# Altium PCB button_ban_dao_pcb.PcbDoc
Units mil, origin at the board's own origin, x right, y up, seen from the top; angles counter-clockwise.
Board outline 1692.91 x 1692.91 mil, 2 copper layers (Top Layer, Bottom Layer); 19 components, 12 nets, 42 pads, 0 vias.
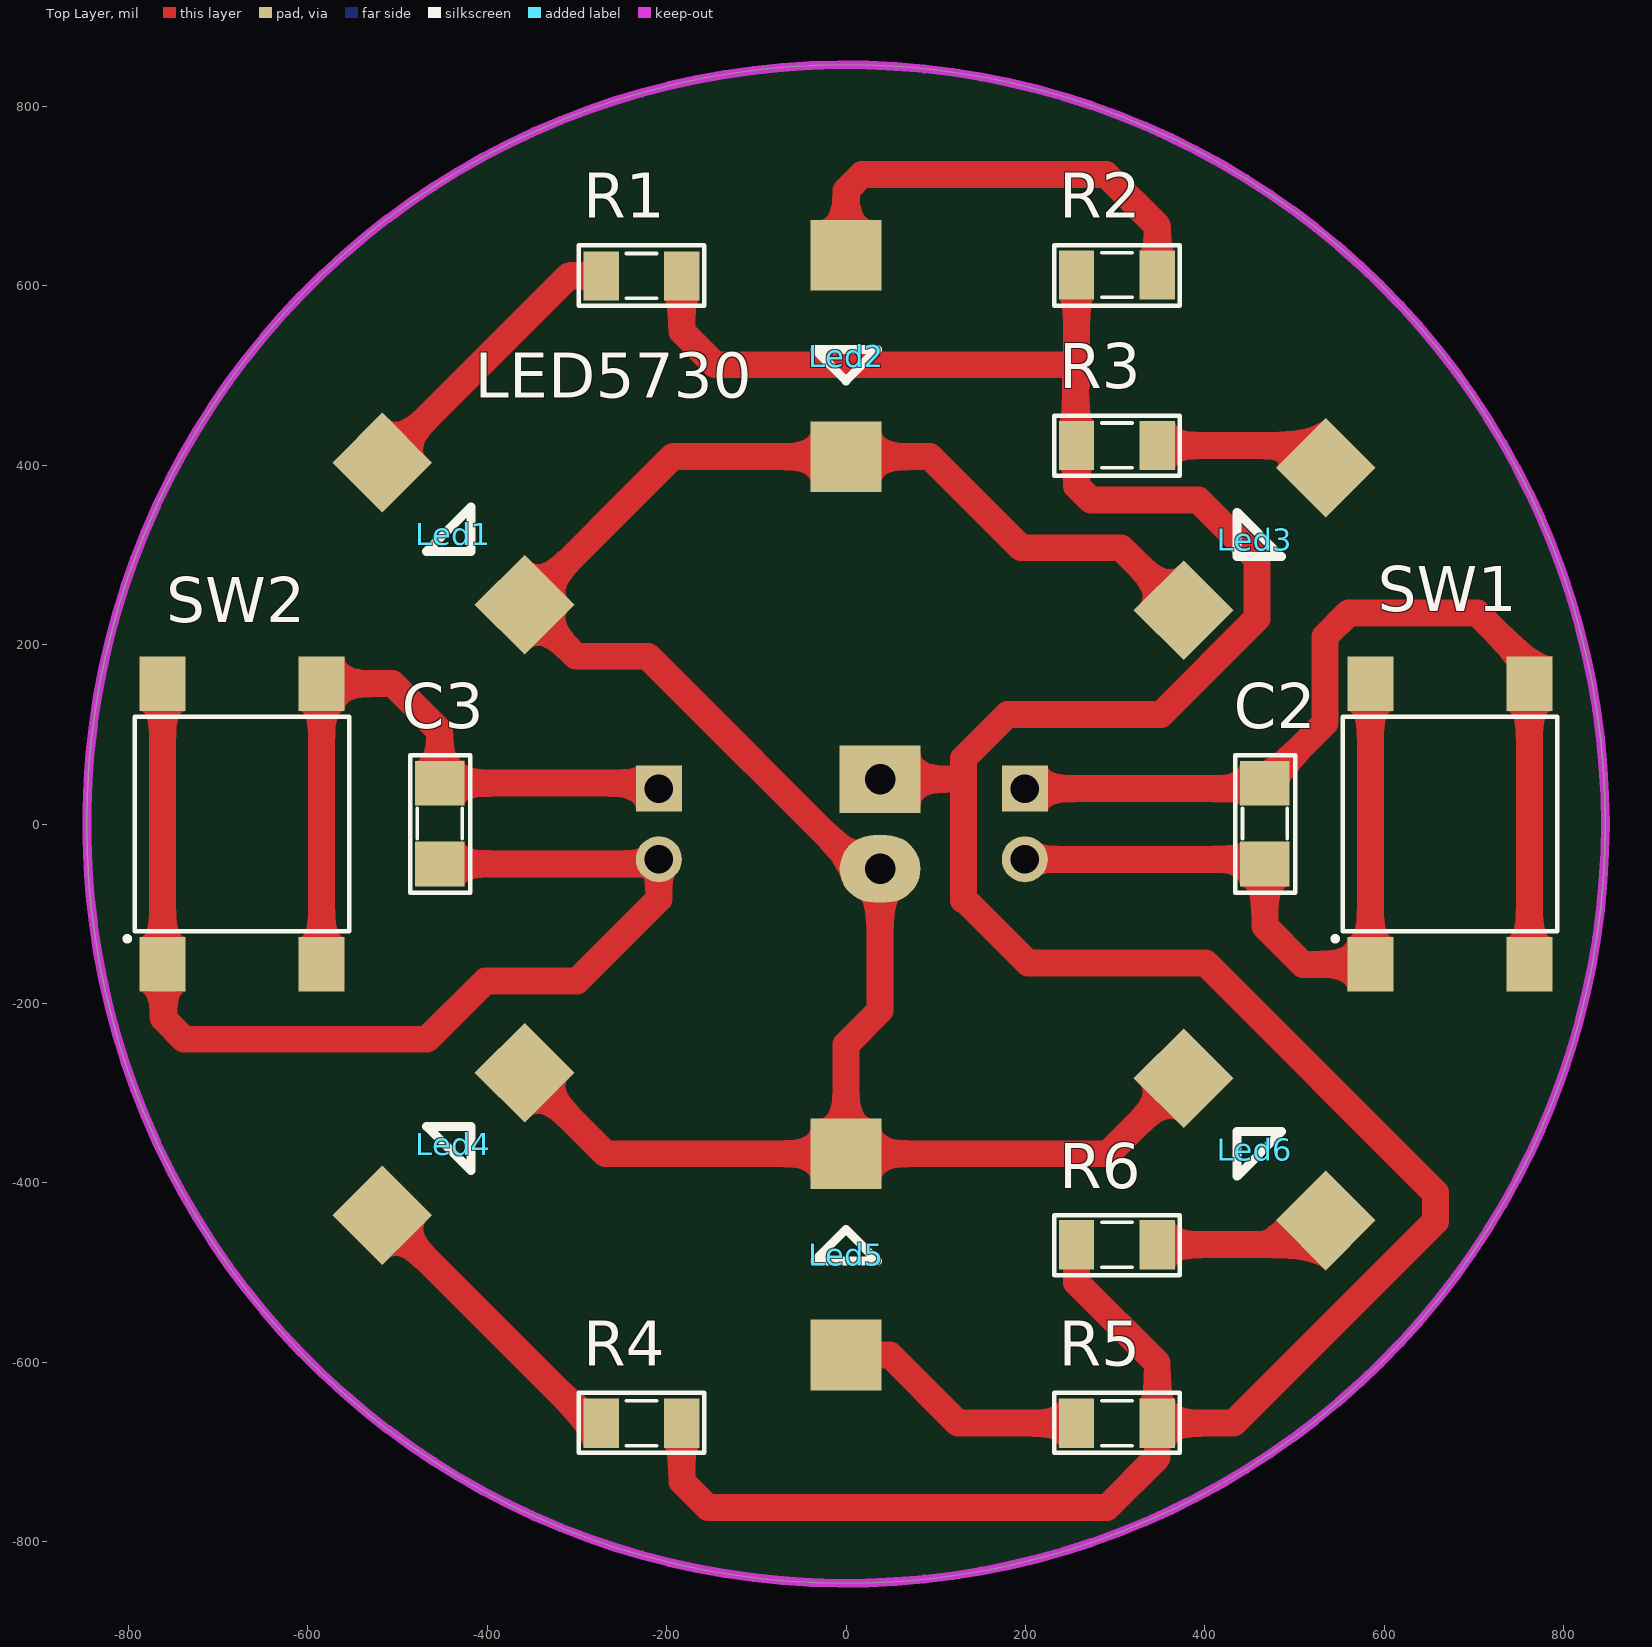
[diagram p0: Top Layer view]
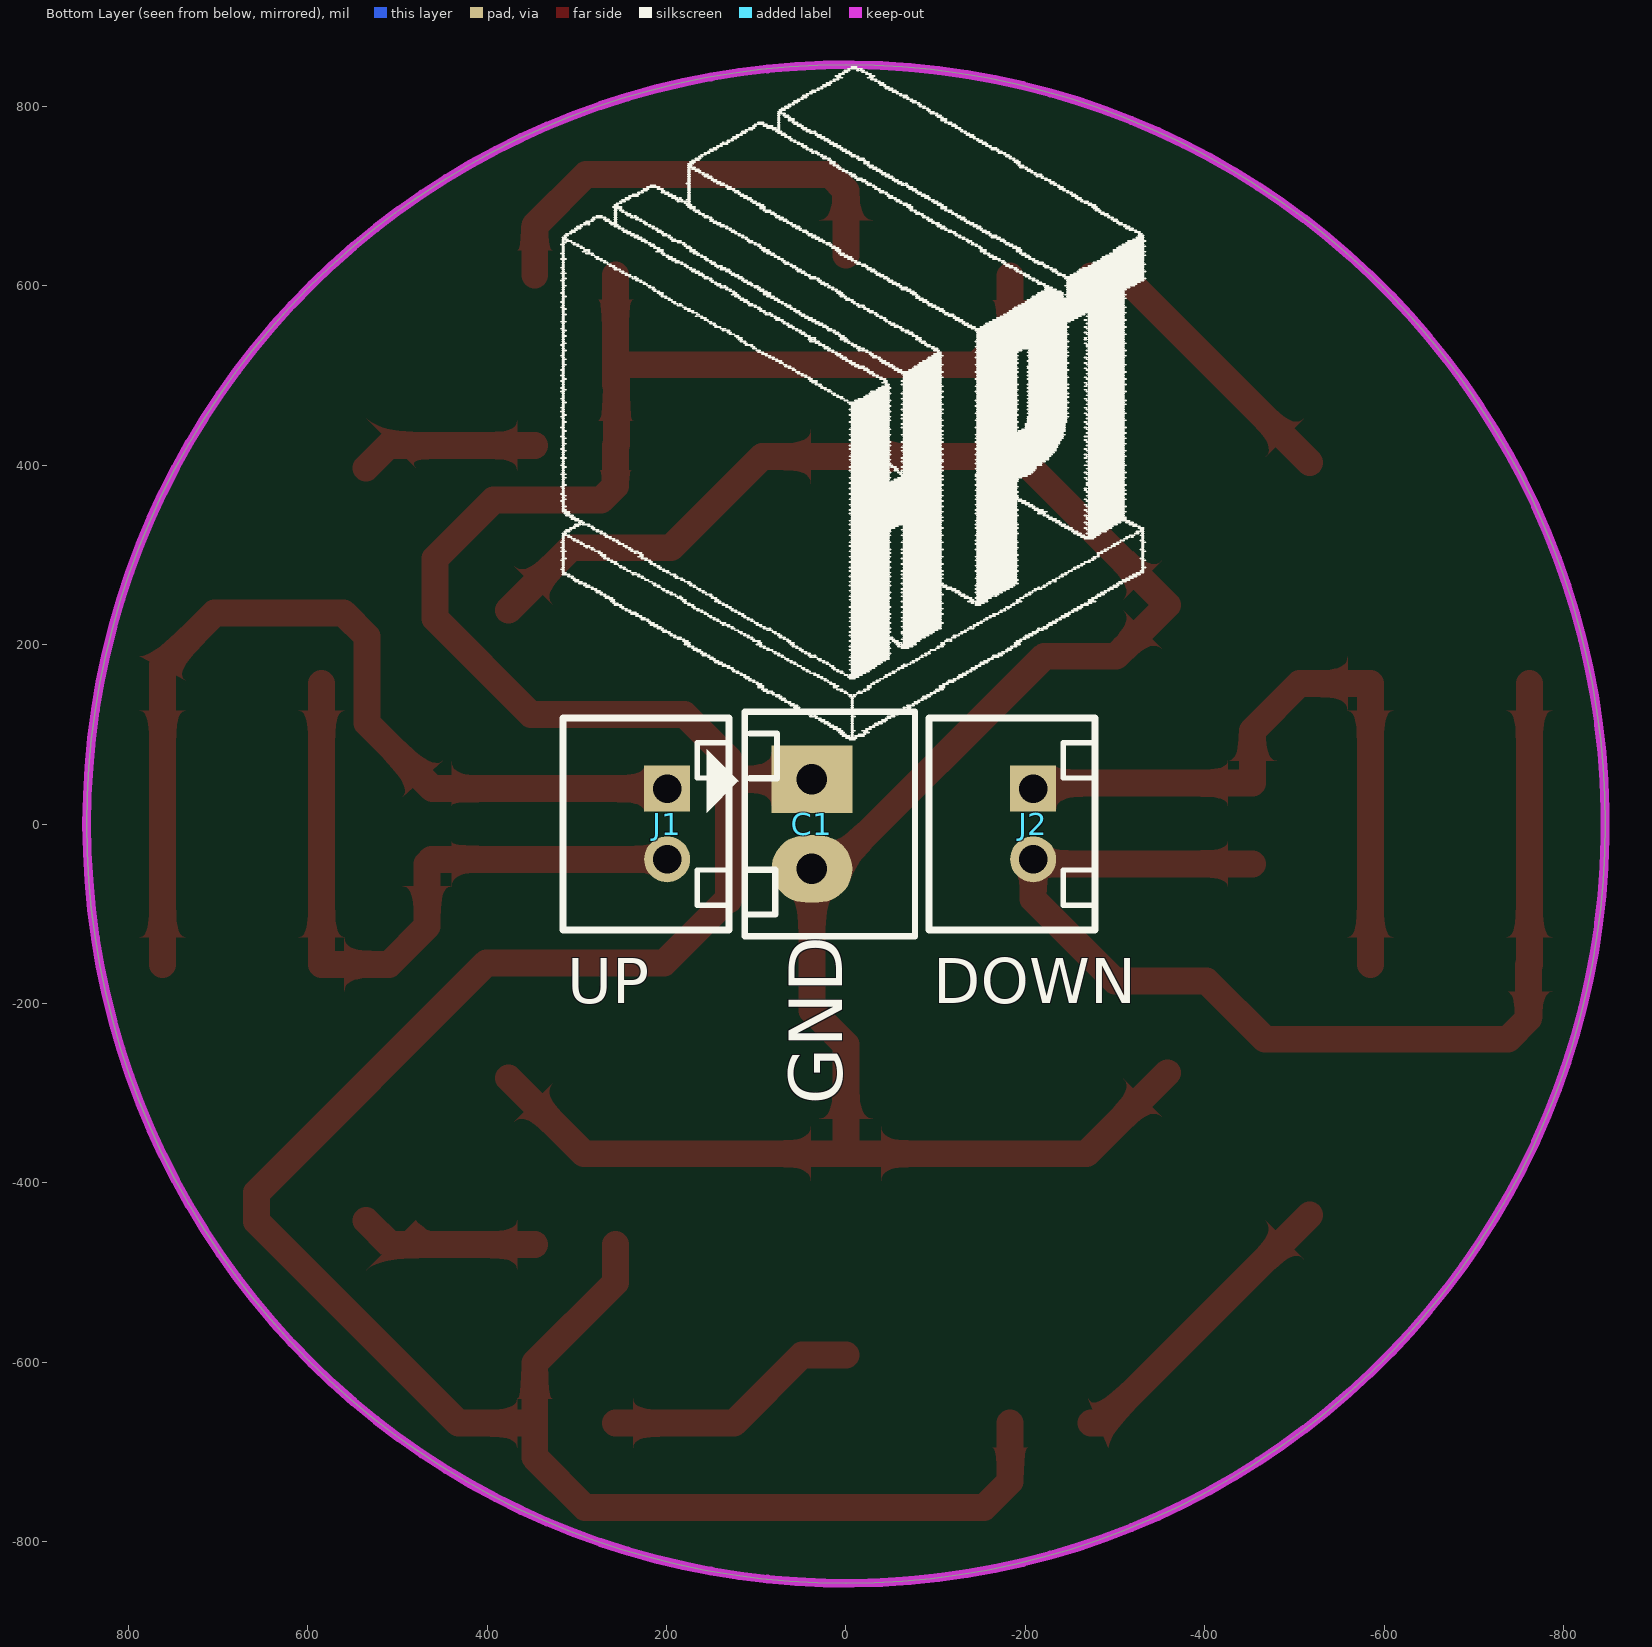
[diagram p1: Bottom Layer view, seen from below]
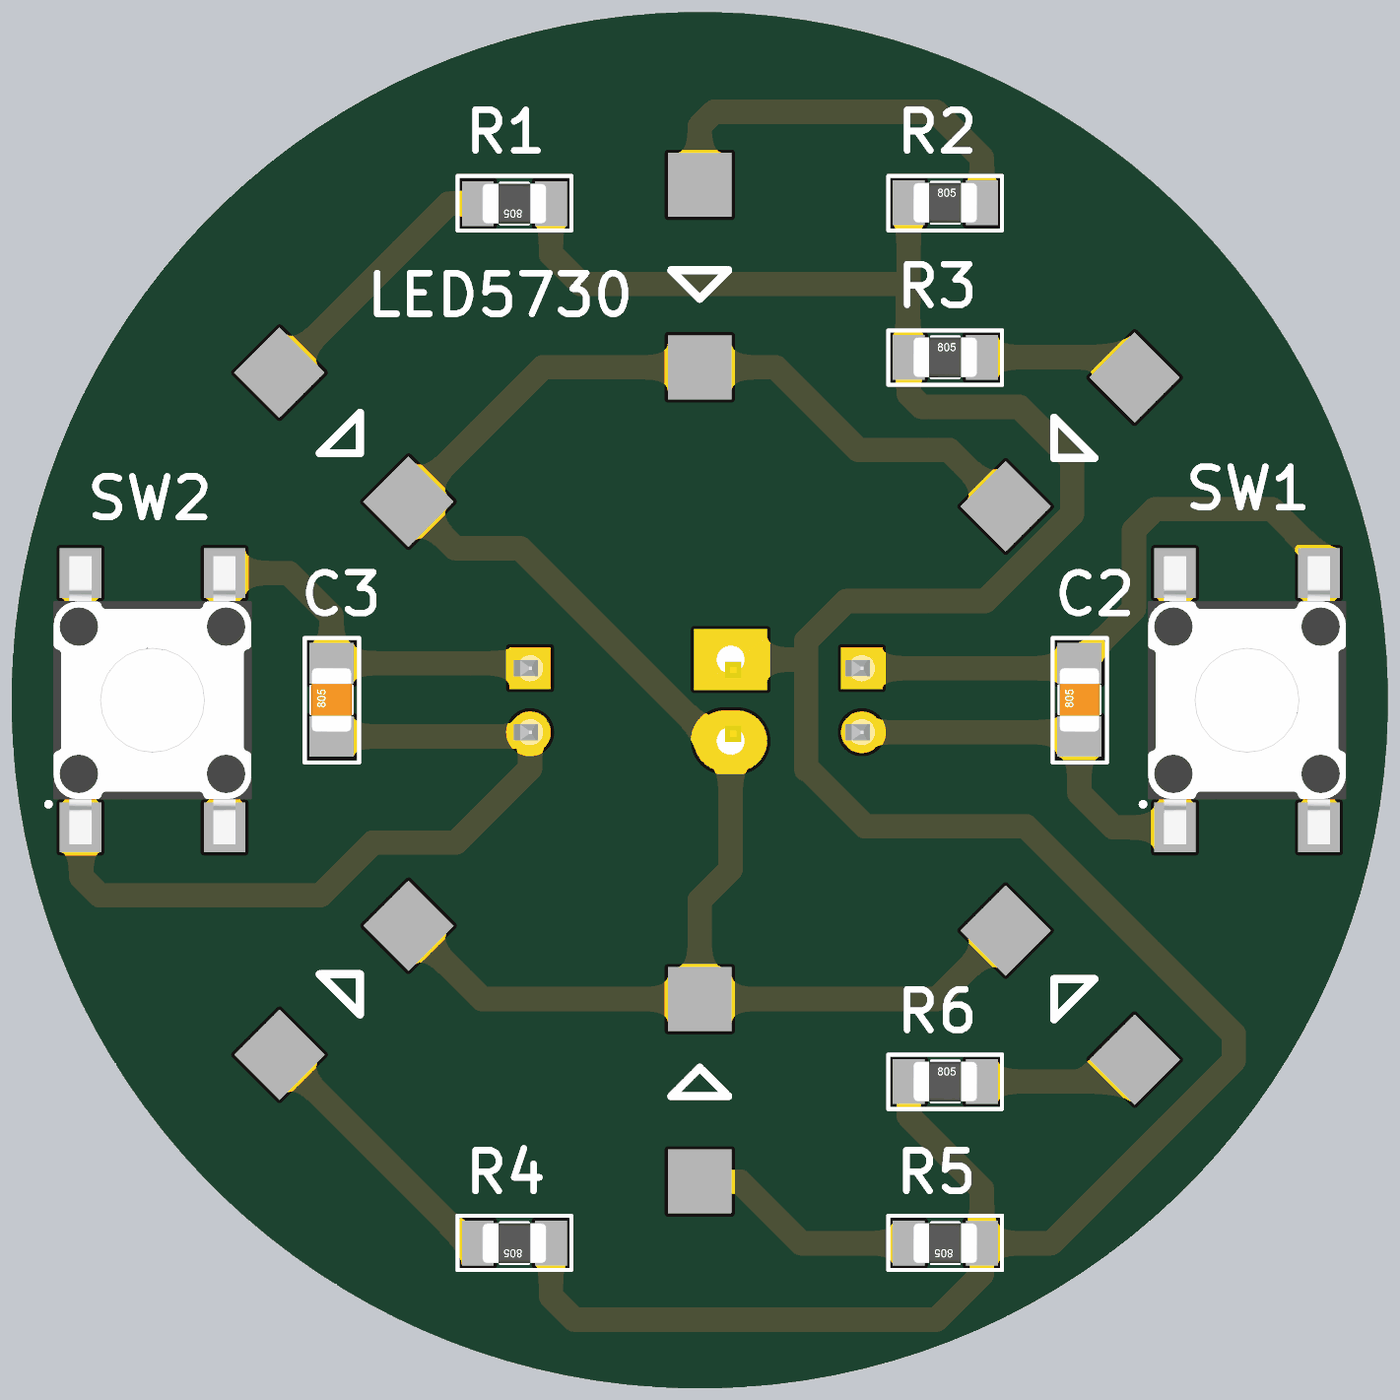
[diagram p2: 3D render of the assembled board from above, using the file's embedded part models]
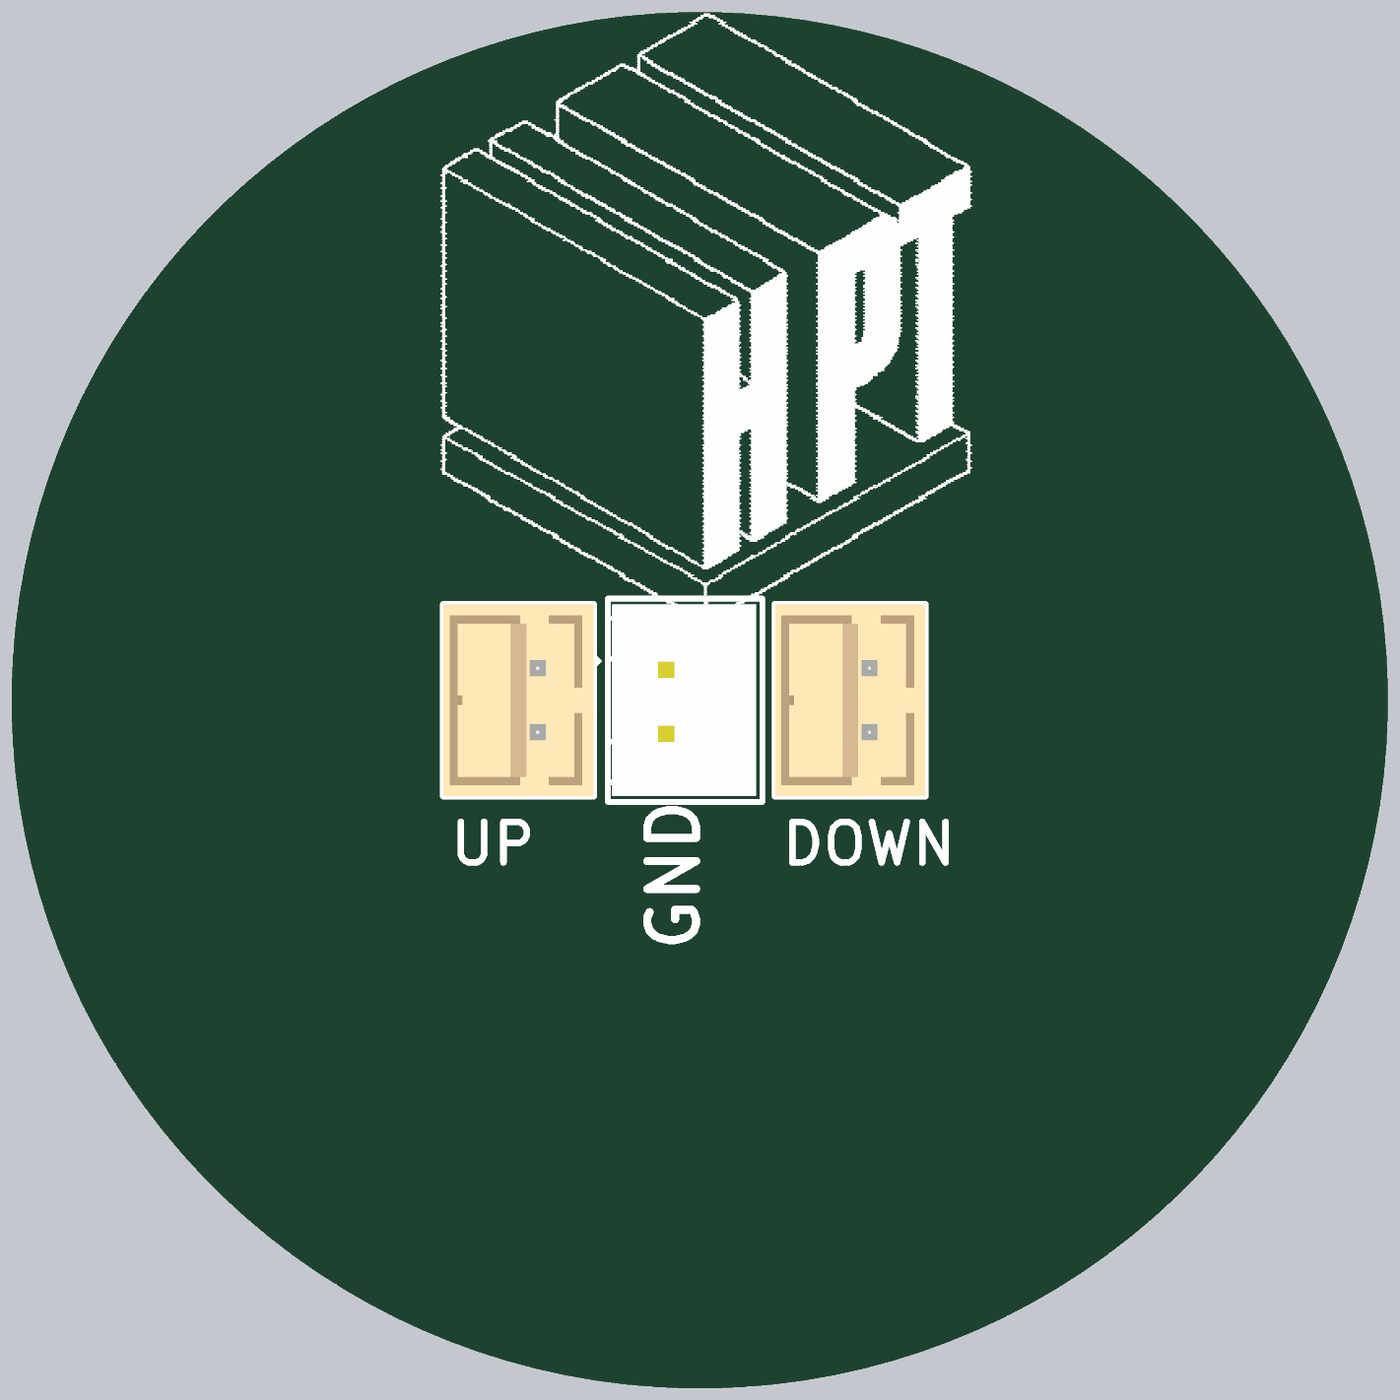
[diagram p3: 3D render of the assembled board from below, using the file's embedded part models]

## Layer stack, top to bottom
Top Solder: solder mask 0.4, Solder Resist, Dk 3.5
Top Layer: signal copper 1.4
Dielectric 1: dielectric 12.6, FR-4, Dk 4.8
Bottom Layer: signal copper 1.4
Bottom Solder: solder mask 0.4, Solder Resist, Dk 3.5

## Board outline
-846.46,0 ccw(c0,0) 0,-846.46 ccw(c0,0) 846.46,0 ccw(c0,0) 0,846.46 ccw(c0,0)

## Design rules (kind name [scope] priority, off if disabled: settings)
Clearance [All] p1: gap=10
PolygonConnect [All] p1: connectstyle=Relief reliefconductorwidth=10 reliefentries=4 polygonreliefangle="90 Angle" airgapwidth=10
RoomDefinition button_ban_dao_schematic [InComponentClass('button_ban_dao_schematic')] p1: confinementstyle=ConfineIn formatcopy=TRUE lockcomponents=FALSE outline 1170,-672 4365,-672 4365,-162 1170,-162
RoutingVias [All] p1: holewidth=15 width=25 viastyle="Through Hole" minholewidth=15 minwidth=25 maxholewidth=28 maxwidth=50
SolderMaskExpansion [All] p1: expansion=4
Width [All] p1: maxlimit=50 minlimit=10 preferedwidth=10
30 further rules are at their usual default settings.

## Components (designator, comment, footprint, x,y, rotation, side; value= is the part's Value field where it differs from the comment)
C1 "Header2" Header2 38,50 r270 bottom
C2 "104" SM-CAP-0805 467,-44.5 r90 top
C3 "104" SM-CAP-0805 -453,-44.5 r90 top
J1 "UP" 62000211622 223,0 r90 bottom
J2 "DOWN" 62000211622 -185,0 r90 bottom
Led1 "LED5730" LED5730 -517,403 r315 top
Led2 "LED5730" LED5730 0,634 r270 top
Led3 "LED5730" LED5730 535,397 r225 top
Led4 "LED5730" LED5730 -517,-436 r45 top
Led5 "LED5730" LED5730 0,-592 r90 top
Led6 "LED5730" LED5730 535,-442 r135 top
R1 "Res" RES-SMD-0805 -228,611 r180 top
R2 "Res" RES-SMD-0805 302,612 r0 top
R3 "Res" RES-SMD-0805 302,422 r0 top
R4 "Res" RES-SMD-0805 -228,-668 r180 top
R5 "Res" RES-SMD-0805 302,-668 r180 top
R6 "Res" RES-SMD-0805 302,-469 r0 top
SW1 "SW" SW2-SMD 673.23,0 r90 top
SW2 "SW" SW2-SMD -673.23,0 r90 top

## Footprints (in the part's own frame and the unit in brackets; to place one, negate y for a bottom-side part, rotate by r counter-clockwise, add the part's x,y. Pads: shape width x height; smd on the part's side, far side on the other; paste and mask are expansions set on the pad)
62000211622 [mm] "2.00mm Male Vertical Shrouded Header, 2p"
  rect 1.3x1.3 hole 0.8: 1(1,-0.6)
  round 1.3 hole 0.8: 2(-1,-0.6)
  silkscreen extent -3,-2.35 3,2.35, body extent -3,-2.35 3,2.35, height 6.15
Header2 [mil] "CON2"
  rect 75x90 hole 34: 1(0,0)
  oval 75x90 hole 34: 2(100,0)
  silkscreen extent -75,-118 175,115, body extent -68,-70 168,107, height 236
LED5730 [mm]
  rect 2x2 smd: 0(0,0) 1(5.7,0)
  silkscreen extent 2.67,-0.89 3.56,0.89
RES-SMD-0805 [mil]
  rect 39.37x55 smd: 1(-45,0) 2(45,0)
  silkscreen extent -70,-34 70,33, body extent -39,-25 39,25, height 31
SM-CAP-0805 [mil]
  rect 50x55 smd: 1(0,0) 2(90,0)
  silkscreen extent -32,-34 121,33, body extent 6,-25 84,25, height 31
SW2-SMD [mm] "6*6mm vertical type, SMD, height 5.0mm, black actuator, 160gf, T&R"
  rect 1.55x1.3 smd: 1(-3.975,2.25) 2(-3.975,-2.25) 3(3.975,-2.25) 4(3.975,2.25)
  silkscreen extent -3.29,-3.04 3.04,3.29, body extent -4.5,-3.1 4.5,3.1, height 4.99

## Part data
C1: "Header IDC, 2 x 1 Pin Vertical 2.54mm Pitch (Non-Boxed, Male)"
C2 C3: library part CN
J1 J2: library part 62000211622, "WR-WTB 2.00mm Male Vertical Shrouded Header, 2p"
R1 R2 R3 R4 R5 R6: library part Res-SMD, "Resistor"
SW1 SW2: library part SW4, "Switch button 4 pin"

## Nets (pads, with @x,y where several pads share a name; then routed paths per layer and width w, separated by ;. In a path a pad name is that pad's centre, name@x,y a point inside that pad or via, vN(x,y) a via of type N, cw(c..) or ccw(c..) an arc to the next point about the centre after c; other vN are vias at no path point)
12V: C1.1 R1.1 R2.1 R3.1 R4.1 R5.1 R6.1 | length 3720.3
  Top Layer w30: R4.1 -183,-733 -154,-762 291,-762 347,-706 R5.1 ; R1.1 -183,549 -146,512 256,512 256,423 R3.1 257,377 273,361 393,361 458,296 458,228.97 351.03,122 180,122 131,73 131,52 ; C1.1 129,50 131,52 ; R6.1 257,-511 347,-601 R5.1 ; 257,490 R2.1 ; 131,52 131,-85 132,-84 203,-155 401,-155 657,-411 657,-443 432,-668 R5.1
GND: C1.2 Led1.1 Led2.1 Led3.1 Led4.1 Led5.1 Led6.1 | length 2532.5
  Top Layer w30: Led4.1 -268.05,-367.59 Led5.1 ; Led6.1 292.05,-367.59 Led5.1 ; Led3.1 306.64,308 195,308 93.41,409.59 Led2.1 -193.05,409.59 Led1.1 -301,187 -221,187 16,-50 C1.2 38,-208 0,-246 Led5.1
NetC2_1: C2.1 J1.2 SW1.1 SW1.4 | length 787.5
  Top Layer w30: J1.2 461.87,-39.37 C2.1 467,-114 509.5,-156.5 SW1.1 SW1.4
NetC2_2: C2.2 J1.1 SW1.2 SW1.3 | length 1057.6
  Top Layer w30: J1.1 460.87,39.37 534.06,112.56 534.06,209.05 560,235 704,235 761.81,177.19 SW1.3 SW1.2
NetC3_1: C3.1 J2.2 SW2.1 SW2.4 | length 1291.3
  Top Layer w30: SW2.4 SW2.1 -761,-157.31 -761,-217 -738,-240 -467,-240 -402,-175 -300,-175 -208.62,-83.62 J2.2 -213.75,-44.5 C3.1
NetC3_2: C3.2 J2.1 SW2.2 SW2.3 | length 771.8
  Top Layer w30: SW2.2 SW2.3 -505.5,156.5 -453,104 C3.2 -214.75,45.5 J2.1
NetLed1_0: Led1.0 R1.2 | length 330.2
  Top Layer w30: Led1.0 -309,611 R1.2
NetLed2_0: Led2.0 R2.2 | length 505.1
  Top Layer w30: Led2.0 0,706 18,724 290,724 347,667 R2.2
NetLed3_0: Led3.0 R3.2 | length 198.4
  Top Layer w30: R3.2 510,422 Led3.0
NetLed4_0: Led4.0 R4.2 | length 340.1
  Top Layer w30: Led4.0 -285,-668 R4.2
NetLed5_0: Led5.0 R5.2 | length 288.5
  Top Layer w30: Led5.0 49,-592 125,-668 R5.2
NetLed6_0: Led6.0 R6.2 | length 199.2
  Top Layer w30: R6.2 508,-469 Led6.0

## Keep-outs
Keep-Out Layer:
  circle w10: c0,0 r846.46

## Silkscreen, mask and mechanical layers (free items; w line width, h text height)
Bottom Overlay:
  drawing of 2330 lines, arcs and shapes, not listed
  text "GND" at 4,-313 h60 r270